# Altium PCB SAP18.PcbDoc
Units mm, origin at the board's own origin, x right, y up, seen from the top; angles counter-clockwise.
Board outline 75.31 x 34.92 mm, 4 copper layers (Top Layer, GND, PWR, Bottom Layer), stack 0.778 mm thick; 141 components, 125 nets, 471 pads, 130 vias.
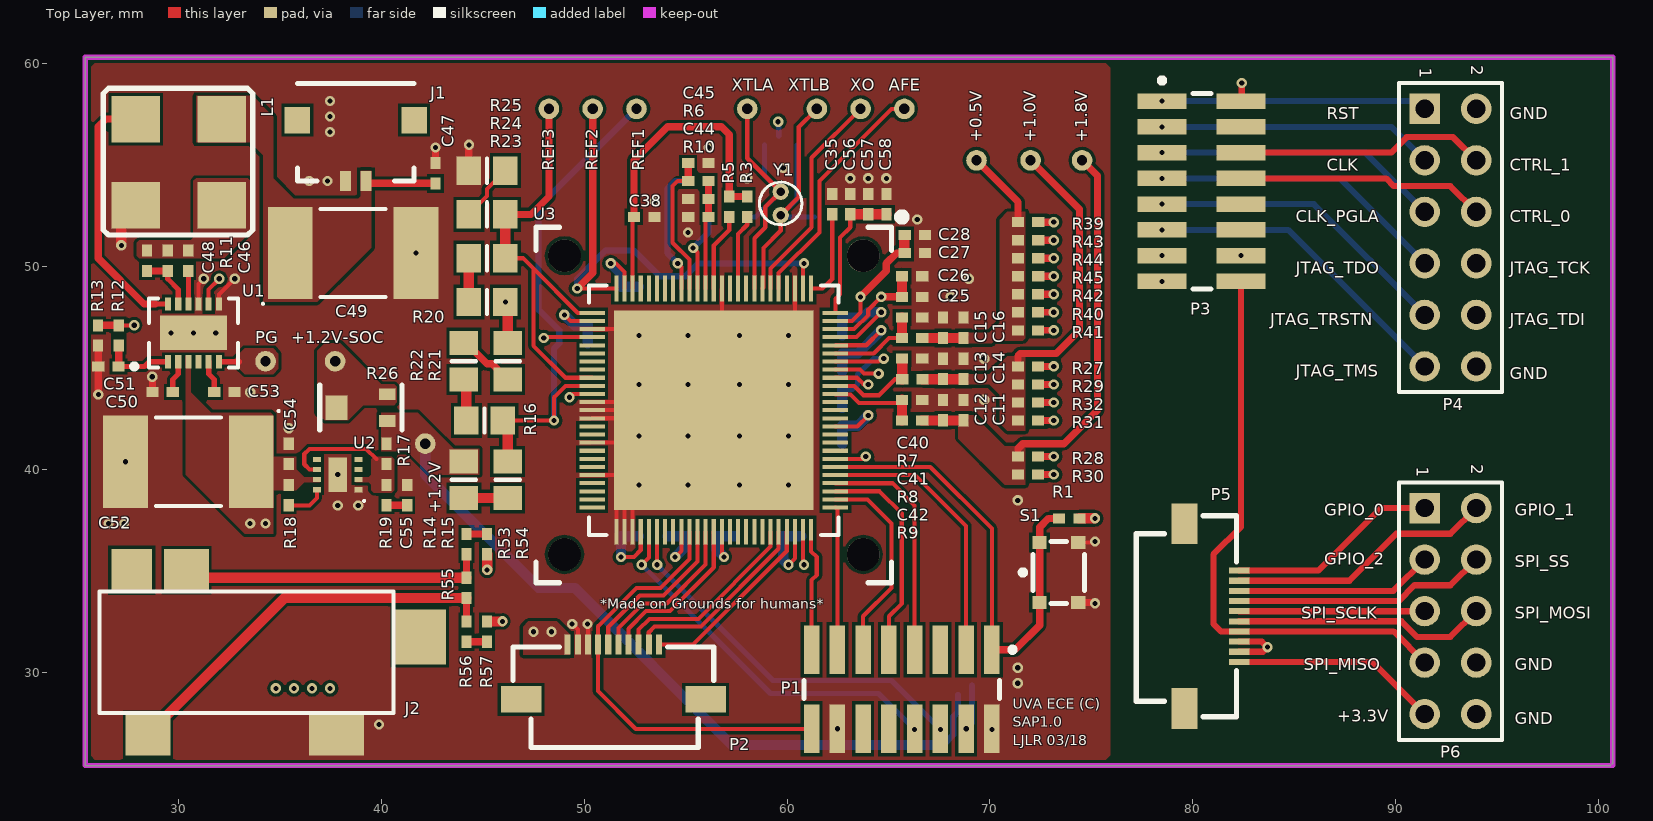
[diagram p0: Top Layer view]
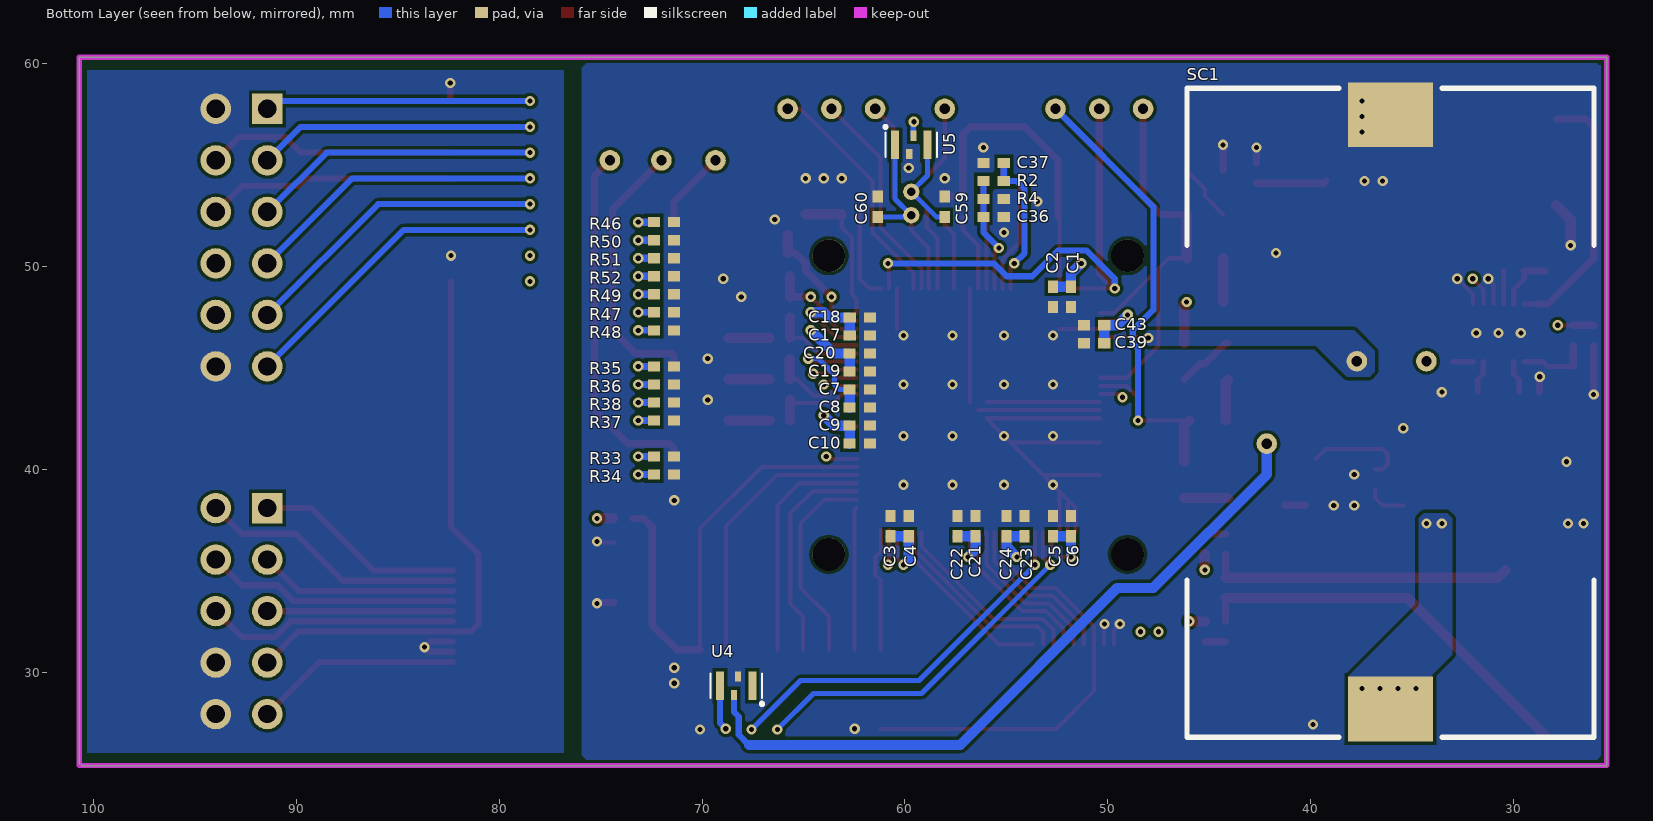
[diagram p1: Bottom Layer view, seen from below]
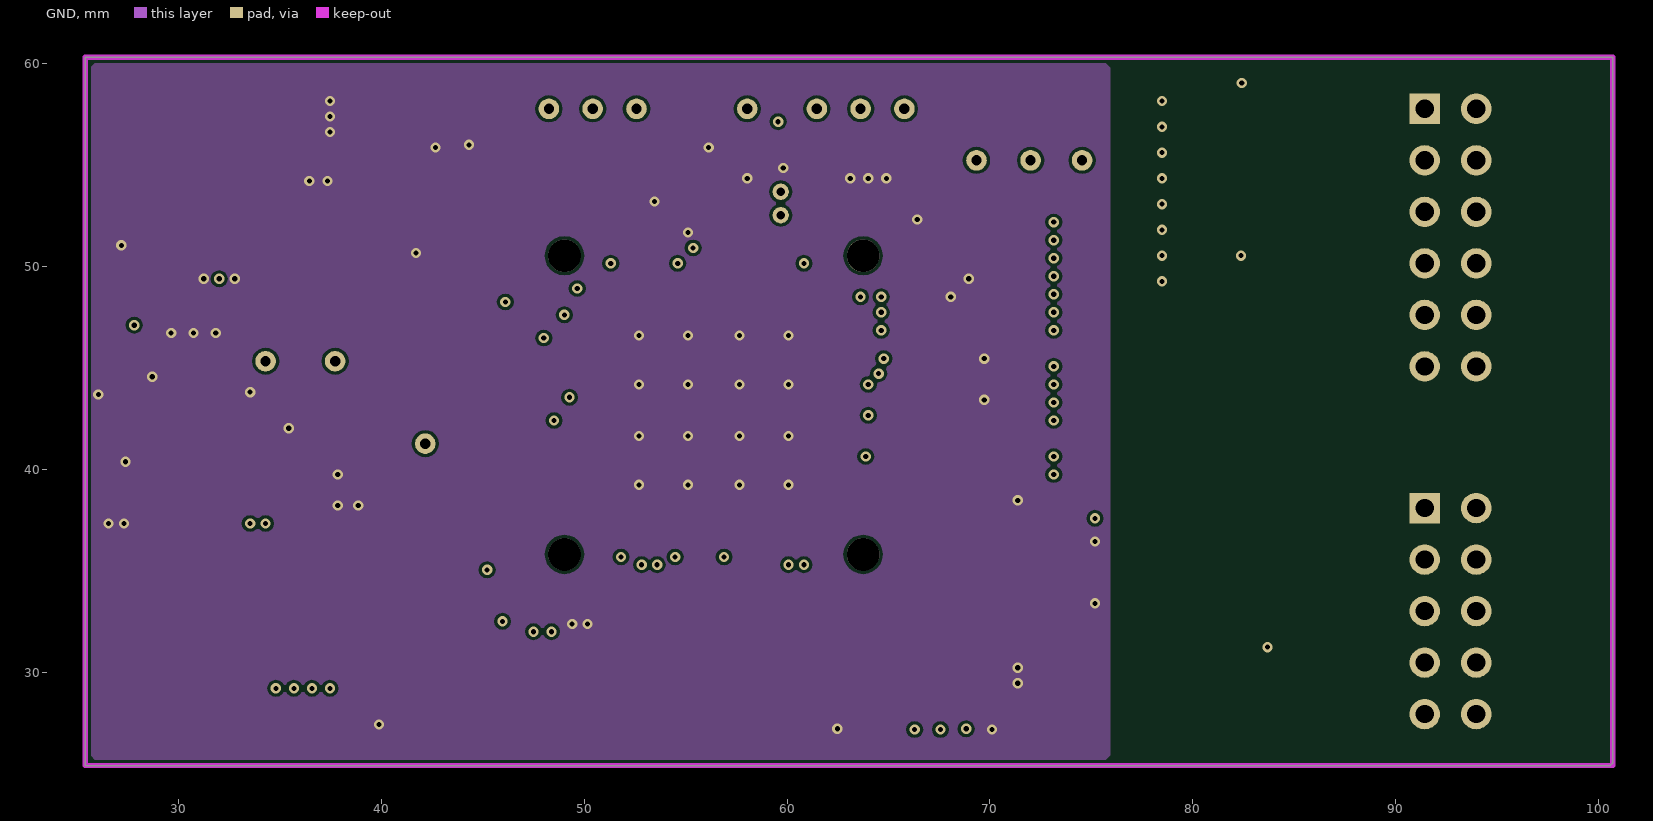
[diagram p2: GND]
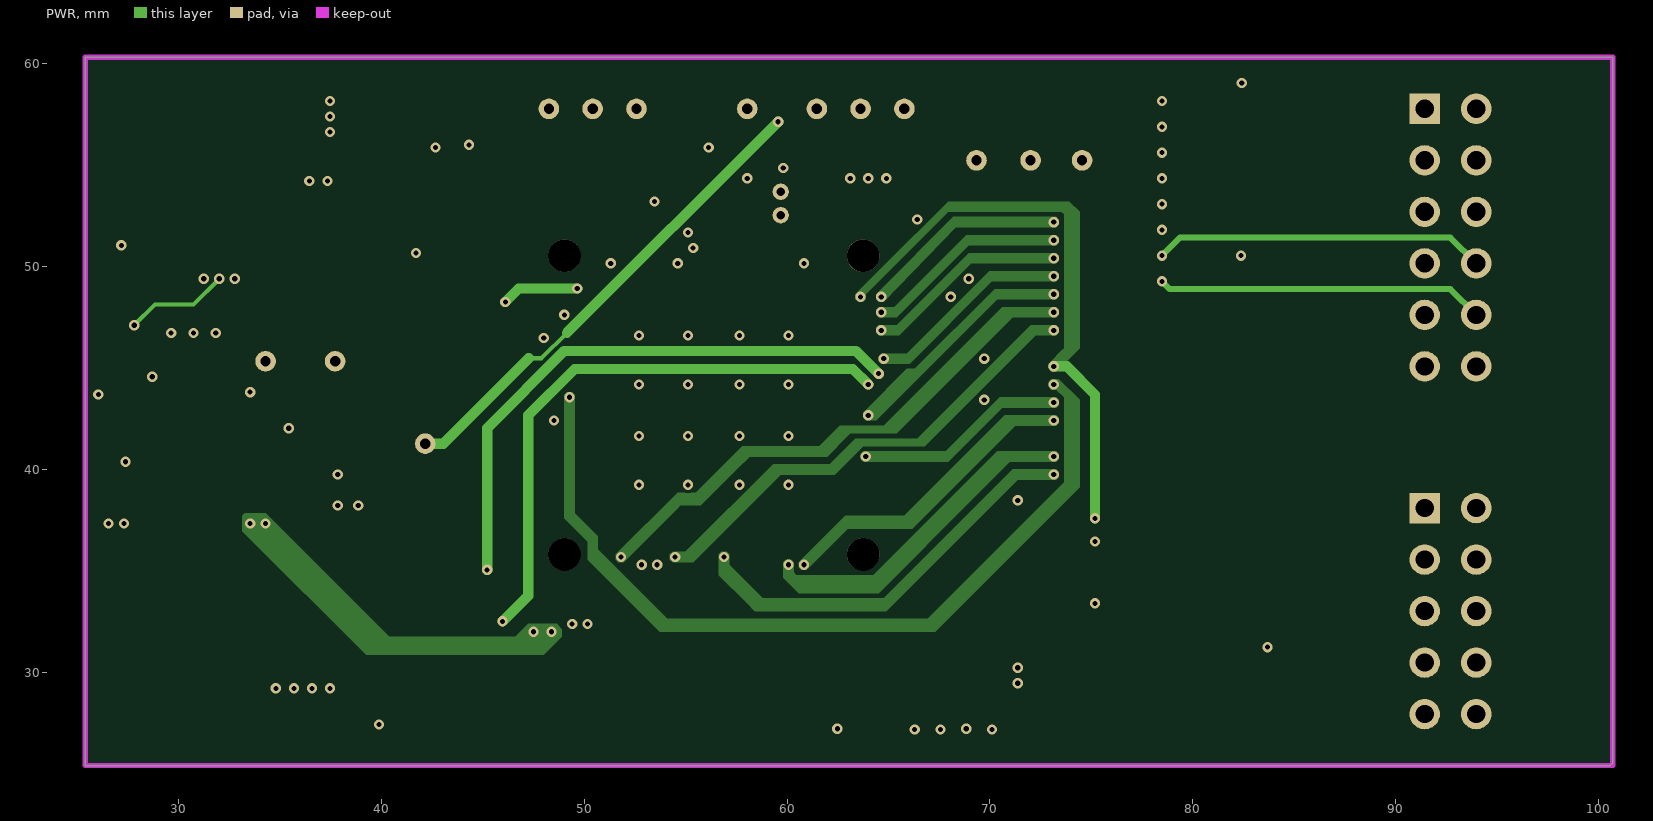
[diagram p3: PWR]

## Layer stack, top to bottom
Top Solder: solder mask 0.0102, Solder Resist, Dk 3.5
Top Layer: signal copper 0.0356
Dielectric 1: core 0.254, FR-4, Dk 4.2
GND: signal copper 0.036
Dielectric 3: prepreg 0.127, Dk 4.2
PWR: signal copper 0.036
Dielectric 2: core 0.254, Dk 4.2
Bottom Layer: signal copper 0.0356
Bottom Solder: solder mask 0.0102, Solder Resist, Dk 3.5

## Board outline
25.4,60.325 100.711,60.325 100.711,25.527 100.584,25.4 25.4,25.4

## Design rules (kind name [scope] priority, off if disabled: settings)
Clearance Clearance_InLayer [OnLayer('SL1') OR OnLayer('SL2') OR OnLayer('PWR_T') OR OnLayer('PWR_B') vs OnLayer('SL1')  OR OnLayer('SL2')  OR OnLayer('PWR_B') OR OnLayer('PWR_T')] p1: gap=0.254
Clearance [All] p2: gap=0.152
HoleToHoleClearance [All] p1: gap=0.152 allowstackedmicrovias=TRUE
MinimumAnnularRing [All] p1: minimumring=0.127
MinimumSolderMaskSliver [All] p1: minsoldermaskwidth=0.076
PlaneConnect [All] p1: planeconnectstyle=Direct reliefexpansion=0.508 reliefentries=4 reliefconductorwidth=0.254 reliefairgap=0.127
PolygonConnect [All] p1: connectstyle=Direct reliefconductorwidth=0.254 reliefentries=4 polygonreliefangle="90 Angle" airgapwidth=0.152
RoutingVias [All] p1: holewidth=0.127 width=0.381 viastyle="Through Hole" minholewidth=0.127 minwidth=0.305 maxholewidth=0.711 maxwidth=1.27
SilkToSilkClearance [All] p1: silktosilkclearance=0.076
SilkToSolderMaskClearance [IsPad] p1: minsilkscreentomaskgap=0 clearancetoexposedcopper=TRUE
SolderMaskExpansion [All] p1: expansion=0.102
Width Width_Bottom [OnLayer('Bottom Layer')] p1: maxlimit=0.508 minlimit=0.254 preferedwidth=0.305
Width Width_InLayer [OnLayer('SL1') OR OnLayer('SL2')] p2: maxlimit=0.356 minlimit=0.254 preferedwidth=0.305
Width [All] p3: maxlimit=0.508 minlimit=0.203 preferedwidth=0.356
25 further rules are at their usual default settings.

## Classes and differential pairs
component class SoC18: U3
component class PwrSel: R27 R28 R29 R30 R31 R32 R33 R34 R35 R36 R37 R38 R39 R40 R41 R42 R43 R44 R45 R46 R47 R48 R49 R50 R51 R52
component class Power: +1.2V +1.2V-SOC C46 C47 C48 C49 C50 C51 C52 C53 C54 C55 J1 L1 PG R11 R12 R13 R14 R15 R16 R17 R18 R19 R20 R21 R22 R23 R24 R25 R26 REF1 REF2 REF3 SC1 TP4 U1 U2
component class PMU: +0.5V +1.0V +1.8V C35 C36 C37 C38 C39 C40 C41 C42 C43 C44 C45 R2 R3 R4 R5 R6 R7 R8 R9 R10
component class Digital: P1 P2 R1 S1
component class Caps: C1 C2 C3 C4 C5 C6 C7 C8 C9 C10 C11 C12 C13 C14 C15 C16 C17 C18 C19 C20 C21 C22 C23 C24 C25 C26 C27 C28
component class Analog: AFE C56 C57 C58 C59 C60 J2 R53 R54 R55 R56 R57 U4 U5 XO XTLA XTLB Y1
component class Adapter: P3 P4 P5 P6

## Components (designator, comment, footprint, x,y, rotation, side; value= is the part's Value field where it differs from the comment)
+0.5V "Test point" TP 69.342,55.245 r0 top
+1.0V "Test point" TP 72.009,55.245 r0 top
+1.2V "Test point" TP 42.164,41.275 r90 top
+1.2V-SOC "Test point" TP 37.719,45.339 r90 top
+1.8V "Test point" TP 74.549,55.245 r0 top
AFE "Test point" TP 65.786,57.785 r90 top
C1 "0.1uF" 0402 51.816,48.514 r270 bottom
C2 "250pF" 0402 52.705,48.514 r270 bottom
C3 "0.1uF" 0402 60.706,37.211 r90 bottom
C4 "250pF" 0402 59.817,37.211 r90 bottom
C5 "0.1uF" 0402 52.705,37.211 r90 bottom
C6 "250pF" 0402 51.816,37.211 r90 bottom
C7 "0.1uF" 0402 62.23,43.942 r180 bottom
C8 "250pF" 0402 62.23,43.053 r180 bottom
C9 "0.1uF" 0402 62.23,42.164 r180 bottom
C10 "250pF" 0402 62.23,41.275 r180 bottom
C11 "0.1uF" 0402 68.707,42.926 r90 top
C12 "250pF" 0402 67.691,42.926 r90 top
C13 "0.1uF" 0402 67.691,44.958 r90 top
C14 "250pF" 0402 68.707,44.958 r90 top
C15 "0.1uF" 0402 67.691,46.99 r90 top
C16 "250pF" 0402 68.707,46.99 r90 top
C17 "0.1uF" 0402 62.222,46.609 r180 bottom
C18 "250pF" 0402 62.222,47.498 r180 bottom
C19 "0.1uF" 0402 62.23,44.831 r180 bottom
C20 "250pF" 0402 62.23,45.72 r180 bottom
C21 "0.1uF" 0402 56.515,37.211 r90 bottom
C22 "250pF" 0402 57.404,37.211 r90 bottom
C23 "0.1uF" 0402 54.102,37.211 r90 bottom
C24 "250pF" 0402 54.991,37.211 r90 bottom
C25 "0.1uF" 0402 66.167,48.514 r0 top
C26 "250pF" 0402 66.167,49.53 r0 top
C27 "0.1uF" 0402 66.302,50.673 r0 top
C28 "250pF" 0402 66.302,51.562 r0 top
C35 "Cap Pol3" 0402 62.23,53.086 r90 top
C36 "Cap Pol3" 0402 55.626,52.451 r180 bottom
C37 "Cap Pol3" 0402 55.626,55.118 r0 bottom
C38 "Cap Pol3" 0402 52.959,52.451 r0 top
C39 "Cap Pol3" 0402 50.673,46.228 r0 bottom
C40 "Cap Pol3" 0402 66.167,47.498 r0 top
C41 "Cap Pol3" 0402 66.167,45.466 r0 top
C42 "Cap Pol3" 0402 66.167,43.434 r0 top
C43 "Cap Pol3" 0402 50.673,47.117 r0 bottom
C44 "Cap Pol3" 0402 55.626,53.34 r180 top
C45 "Cap Pol3" 0402 55.626,55.118 r0 top
C46 "Cap Semi" 0402 30.48,50.292 r270 top
C47 "Cap Semi" 0402 42.672,54.61 r90 top
C48 "Cap Semi" 0402 28.448,50.292 r270 top
C49 "330uF" CAPCP7343X43NEW 38.608,50.673 r0 top
C50 "Cap Semi" 0402 29.21,43.815 r0 top
C51 "Cap Semi" 0402 26.543,45.085 r0 top
C52 "220uF" CAPCP7343X43NEW 30.48,40.386 r180 top
C53 "Cap Semi" 0402 32.258,43.815 r180 top
C54 "Cap Semi" 0402 35.433,40.767 r270 top
C55 "Cap Semi" 0402 41.275,38.735 r270 top
C56 "3.3uF" 0402 63.119,53.086 r90 top
C57 "3.3uF" 0402 64.008,53.086 r90 top
C58 "3.3uF" 0402 64.897,53.086 r90 top
C59 "Cap Pol3" 0402 58.039,52.959 r90 bottom
C60 "Cap Pol3" 0402 61.341,52.959 r90 bottom
J1 "MolexPicoLock" 5037630291_MolexPicoLock 38.735,54.229 r0 top
J2 "Audio Jack" "Audio Jack" 29.591,30.988 r0 top
L1 "LPR6235-752" LPR6235-752 32.131,57.277 r270 top
P1 "HDR2X8_127" HDR2X8_127 70.104,31.115 r180 top
P2 "Header 10" 505110-1092 51.435,31.369 r0 top
P3 "HDR2X8_127" HDR2X8_127 78.486,58.166 r270 top
P4 "Header 6X2" HDR2X6 91.44,57.785 r270 top
P5 "Header 10" 505110-1092 82.296,32.766 r270 top
P6 "Header 5X2" HDR2X5 91.44,38.1 r270 top
PG "Test point" TP 34.29,45.339 r90 top
R1 "Res3" 0402 73.914,37.592 r180 top
R2 "Res3" 0402 55.626,54.229 r180 bottom
R3 "Res3" 0402 58.039,52.959 r270 top
R4 "Res3" 0402 55.626,53.34 r0 bottom
R5 "Res3" 0402 57.15,52.959 r90 top
R6 "Res3" 0402 55.626,54.229 r180 top
R7 "Res3" 0402 66.167,46.482 r0 top
R8 "Res3" 0402 66.183,44.45 r0 top
R9 "Res3" 0402 66.167,42.418 r0 top
R10 "Res3" 0402 55.626,52.451 r0 top
R11 "Res3" 0402 29.464,50.292 r270 top
R12 "Res3" 0402 27.051,46.609 r90 top
R13 "Res3" 0402 26.035,46.609 r90 top
R14 "Res3" 6-0805_N 44.069,39.497 r270 top
R15 "Res3" 6-0805_N 46.228,39.497 r90 top
R16 "Res3" 6-0805_N 45.085,42.418 r180 top
R17 "Res3" 0402 40.259,40.767 r90 top
R18 "Res3" 0402 35.433,38.735 r270 top
R19 "Res3" 0402 40.259,38.735 r90 top
R20 "Res3" 6-0805_N 45.212,48.26 r0 top
R21 "Res3" 6-0805_N 46.228,45.339 r270 top
R22 "Res3" 6-0805_N 44.069,45.339 r270 top
R23 "Res3" 6-0805_N 45.212,50.419 r0 top
R24 "Res3" 6-0805_N 45.212,52.578 r180 top
R25 "Res3" 6-0805_N 45.212,54.737 r180 top
R26 "Pot100K" Pot100K 38.989,43.053 r90 top
R27 "Res3" 0402 71.882,45.085 r180 top
R28 "Res3" 0402 71.882,40.64 r180 top
R29 "Res3" 0402 71.882,44.196 r180 top
R30 "Res3" 0402 71.882,39.751 r180 top
R31 "Res3" 0402 71.882,42.418 r180 top
R32 "Res3" 0402 71.882,43.307 r180 top
R33 "Res3" 0402 71.882,40.64 r180 bottom
R34 "Res3" 0402 71.882,39.751 r180 bottom
R35 "Res3" 0402 71.882,45.085 r180 bottom
R36 "Res3" 0402 71.882,44.196 r180 bottom
R37 "Res3" 0402 71.882,42.418 r180 bottom
R38 "Res3" 0402 71.882,43.307 r180 bottom
R39 "Res3" 0402 71.89,52.197 r180 top
R40 "Res3" 0402 71.882,47.752 r180 top
R41 "Res3" 0402 71.882,46.863 r180 top
R42 "Res3" 0402 71.882,48.641 r180 top
R43 "Res3" 0402 71.89,51.308 r180 top
R44 "Res3" 0402 71.89,50.419 r180 top
R45 "Res3" 0402 71.89,49.53 r180 top
R46 "Res3" 0402 71.882,52.197 r180 bottom
R47 "Res3" 0402 71.882,47.752 r180 bottom
R48 "Res3" 0402 71.882,46.863 r180 bottom
R49 "Res3" 0402 71.882,48.641 r180 bottom
R50 "Res3" 0402 71.882,51.308 r180 bottom
R51 "Res3" 0402 71.882,50.419 r180 bottom
R52 "Res3" 0402 71.882,49.53 r180 bottom
R53 "Res3" 0402 44.196,36.322 r90 top
R54 "Res3" 0402 45.212,36.322 r270 top
R55 "Res3" 0402 44.196,34.163 r270 top
R56 "Res3" 0402 44.196,32.004 r270 top
R57 "Res3" 0402 45.212,32.004 r90 top
REF1 "Test point" TP 52.578,57.785 r90 top
REF2 "Test point" TP 50.419,57.785 r90 top
REF3 "Test point" TP 48.26,57.785 r90 top
S1 "Pushbutton" KMT031 73.406,34.925 r90 top
SC1 "SC" SocketBattCR2032 36.068,28.194 r90 bottom
U1 "LTC3108" QFN0P300X400X80_HS-13M 30.734,46.736 r0 top
U2 "MCP1810" MCP1810 37.846,39.751 r180 top
U3 "SoC18" "MLF_7009 - NoHoles" 56.388,42.926 r270 top
U4 "SiT1533" SiT1533 68.326,29.337 r0 bottom
U5 "SiT1533" SiT1533 59.69,56.007 r180 bottom
XO "Test point" TP 63.627,57.785 r90 top
XTLA "Test point" TP 58.039,57.785 r90 top
XTLB "Test point" TP 61.468,57.785 r90 top
Y1 "Xtal" Xtal_C2 59.69,53.467 r270 top

## Footprints (in the part's own frame and the unit in brackets; to place one, negate y for a bottom-side part, rotate by r counter-clockwise, add the part's x,y. Pads: shape width x height; smd on the part's side, far side on the other; paste and mask are expansions set on the pad)
6-0805_N [mm] "Chip Resistor, Body 2.0x1.2mm, IPC Medium Density"
  rect 1.2x1.4 smd: 1(-0.9,0) 2(0.9,0)
  silkscreen extent 0,-0.6 0,0.6, body extent -1.07,-0.7 1.07,0.7, height 0.7
0402 [mm] "Chip Capacitor, Body 1.0x0.5mm, IPC High Density"
  rect 0.6x0.5 smd: 1(-0.5,0) 2(0.5,0)
  body extent -0.55,-0.3 0.55,0.3, height 1.3
505110-1092 [mm] "FFC Connector 10 pins 0.5mm"
  rect 0.3x1 smd: 1(-2.25,0) 2(-1.75,0) 3(-1.25,0) 4(-0.75,0) 5(-0.25,0) 6(0.25,0) 7(0.75,0) 8(1.25,0) 9(1.75,0) 10(2.25,0)
  rect 2x1.3 smd: ""(-4.55,-2.7) ""(4.55,-2.7)
  silkscreen extent -4.95,-5.08 4.95,-0.13, body extent -5.25,-5.27 5.25,0.03, height 1.88
5037630291_MolexPicoLock [mm] "Molex Pico-Lock 2 pin 1.0mm"
  rect 0.55x1 smd: 1(-0.5,0) 2(0.5,0)
  rect 1.26x1.3 smd: ""(-2.875,3) ""(2.875,3)
  silkscreen extent -2.88,0 2.88,4.8, body extent -3.3,-0.31 3.3,4.88, height 1.48
"Audio Jack" [mm] "Audio Jack"
  rect 2.2x2.1 smd: 1(-1.1,-4.05) 2(0.8,4.05)
  rect 2.7x2.1 smd: 3(8.2,-4.05)
  rect 2x2.1 smd: 4(-1.9,4.05)
  rect 2.6x2.7 smd: 5(12.3,0.75)
  silkscreen extent -3.5,-3 11,3, body extent -6.07,-4.55 12.93,4.45, height 6
CAPCP7343X43NEW [mm] "Chip Capacitor, 2-Leads, Body 7.30x4.30mm, IPC Medium Density"
  rect 2.2x4.55 smd: 1(-3.1,0) 2(3.1,0)
  silkscreen extent -4.5,-2.55 1.6,2.17, body extent -3.75,-2.25 3.75,2.25, height 4.3
HDR2X5 [mm] "Connector; Header; 5x2 Position"
  rect 1.5x1.5 hole 0.9: 1(0,0)
  round 1.5 hole 0.9: 2(0,2.54) 3(2.54,0) 4(2.54,2.54) 5(5.08,0) 6(5.08,2.54) 7(7.62,0) 8(7.62,2.54) 9(10.16,0) 10(10.16,2.54)
  silkscreen extent -1.27,-1.27 11.43,3.81
HDR2X6 [mm] "Connector; Header; 6x2 Position"
  rect 1.5x1.5 hole 0.9: 1(0,0)
  round 1.5 hole 0.9: 2(0,2.54) 3(2.54,0) 4(2.54,2.54) 5(5.08,0) 6(5.08,2.54) 7(7.62,0) 8(7.62,2.54) 9(10.16,0) 10(10.16,2.54) 11(12.7,0) 12(12.7,2.54)
  silkscreen extent -1.27,-1.27 13.97,3.81
HDR2X8_127 [mm] "Header 16 positions 1.27mm"
  rect 0.76x2.4 smd: 1(0,0) 2(0,3.9) 3(1.27,0) 4(1.27,3.9) 5(2.54,0) 6(2.54,3.9) 7(3.81,0) 8(3.81,3.9) 9(5.08,0) 10(5.08,3.9) 11(6.35,0) 12(6.35,3.9) 13(7.62,0) 14(7.62,3.9) 15(8.89,0) 16(8.89,3.9)
  silkscreen extent -1.14,-0.13 9.27,2.41, body extent -0.63,-0.85 9.53,4.66, height 6.4
KMT031 [mm] "Ultra-low Profile Tact Switch"
  rect 0.65x0.7 smd: 1(-1.475,0.95) 2(1.475,0.95) 3(-1.475,-0.95) 4(1.475,-0.95)
  silkscreen extent -1.52,-1.27 1.52,1.9
LPR6235-752 [mm] "Inductor LPR6235-752"
  round 1 on Top Overlay: 0(-2.032,1.905)
  rect 2.3x2.4 smd: 1(0,0) 2(0,-4.25) 3(4.25,-4.25) 4(4.25,0)
  silkscreen extent -1.52,-5.84 5.72,1.52, body extent -0.92,-5.29 5.16,0.79, height 3.55
MCP1810 [mm] "QFN, 8-Leads, Body 2.00x2.00mm, Pitch 0.50mm, Thermal Pad 0.90x1.70mm, IPC Low Density"
  rect 0.4x0.25 smd: 1(-1.025,0.75) 2(-1.025,0.25) 3(-1.025,-0.25) 4(-1.025,-0.75) 5(1.025,-0.75) 6(1.025,-0.25) 7(1.025,0.25) 8(1.025,0.75)
  rect 0.9x1.7 smd: 9(0,0)
  silkscreen extent -1.35,1.25 -1.25,1.35, body extent -1,-1 1,1, height 0.9
"MLF_7009 - NoHoles" [mm] "QFN, 100-Leads, Body 12.00x12.00mm, Pitch 0.40mm, Thermal Pad 10.10x10.10mm, IPC Low Density"
  rect 1.26x0.2 smd: 1(-6,4.8) 2(-6,4.4) 3(-6,4) 4(-6,3.6) 5(-6,3.2) 6(-6,2.8) 7(-6,2.4) 8(-6,2) 9(-6,1.6) 10(-6,1.2) 11(-6,0.8) 12(-6,0.4) 13(-6,0) 14(-6,-0.4) 15(-6,-0.8) 16(-6,-1.2) 17(-6,-1.6) 18(-6,-2) 19(-6,-2.4) 20(-6,-2.8) 21(-6,-3.2) 22(-6,-3.6) 23(-6,-4) 24(-6,-4.4) 25(-6,-4.8) 51(6,-4.8) 52(6,-4.4) 53(6,-4) 54(6,-3.6) 55(6,-3.2) 56(6,-2.8) 57(6,-2.4) 58(6,-2) 59(6,-1.6) 60(6,-1.2) 61(6,-0.8) 62(6,-0.4) 63(6,0) 64(6,0.4) 65(6,0.8) 66(6,1.2) 67(6,1.6) 68(6,2) 69(6,2.4) 70(6,2.8) 71(6,3.2) 72(6,3.6) 73(6,4)
  rect 0.2x1.26 smd: 26(-4.8,-6) 27(-4.4,-6) 28(-4,-6) 29(-3.6,-6) 30(-3.2,-6) 31(-2.8,-6) 32(-2.4,-6) 33(-2,-6) 34(-1.6,-6) 35(-1.2,-6) 36(-0.8,-6) 37(-0.4,-6) 38(0,-6) 39(0.4,-6) 40(0.8,-6) 41(1.2,-6) 42(1.6,-6) 43(2,-6) 44(2.4,-6) 45(2.8,-6) 46(3.2,-6) 47(3.6,-6) 48(4,-6) 49(4.4,-6) 50(4.8,-6) 76(4.8,6) 77(4.4,6) 78(4,6) 79(3.6,6) 80(3.2,6) 81(2.8,6) 82(2.4,6) 83(2,6) 84(1.6,6) 85(1.2,6) 86(0.8,6) 87(0.4,6) 88(0,6) 89(-0.4,6) 90(-0.8,6) 91(-1.2,6) 92(-1.6,6) 93(-2,6) 94(-2.4,6) 95(-2.8,6) 96(-3.2,6) 97(-3.6,6) 98(-4,6) 99(-4.4,6) 100(-4.8,6)
  rect 1.06x0.2 smd: 74(5.9,4.4) 75(5.9,4.8)
  rect 9.85x9.85 smd: 101(0,0)
  round 1.61 hole 1.61 unplated: ""(-7.612,-7.362) ""(-7.612,7.362) ""(7.113,-7.362) ""(7.113,7.362)
  silkscreen extent -9.65,-8.76 8.51,9.4, body extent -6,-6 6,6, height 1
Pot100K [mm] "EVM-2WSX80B15 100K Trimpot SMD"
  rect 0.575x0.8 smd: 1(-0.663,-1.3) 3(0.663,-1.3)
  rect 1.2x1.1 smd: 2(0,1.2)
  silkscreen extent -1.1,-2.03 1.1,2.03
QFN0P300X400X80_HS-13M [mm] "QFN, 12-Leads, Body 3.00x4.00mm, Pitch 0.00mm/0.50mm, Thermal Pad 1.70x3.30mm, IPC Low Density"
  rect 0.3x0.65 smd: 1(-1.25,-1.425) 2(-0.75,-1.425) 3(-0.25,-1.425) 4(0.25,-1.425) 5(0.75,-1.425) 6(1.25,-1.425) 7(1.25,1.425) 8(0.75,1.425) 9(0.25,1.425) 10(-0.25,1.425) 11(-0.75,1.425) 12(-1.25,1.425)
  rect 3.3x1.7 smd: 13(0,0)
  silkscreen extent -3.04,-1.78 2.2,1.7, body extent -2.05,-1.55 2.05,1.55, height 0.8
SiT1533 [mm] "Ultra-low Power 32 KHz Clock"
  rect 0.4x1.4 smd: 1(-0.8,0) 3(0.8,0)
  rect 0.3x0.5 smd: 2(-0.1,-0.45) 4(0.1,0.45)
  silkscreen extent -1.3,-0.6 1.27,0.91
SocketBattCR2032 [mm] "Socket Battery CR2032"
  rect 3.2x4.2 smd: 1(0,0) 2(29.3,0)
  silkscreen extent -1.4,-10.03 30.61,10.03, body extent -1.39,-10 30.61,10, height 5.3
TP [mil] "Test point"
  round 40 hole 20: 1(0,0)
Xtal_C2 [mm]
  round 0.8 hole 0.4: 1(-0.229,0) 2(0.928,0)
  silkscreen extent -0.7,-1.05 1.4,1.05, body extent -0.61,-1 1.38,1, height 6

## Part data
C1 C2 C3 C4 C5 C6 C7 C8 C9 C10 C11 C12 C13 C14 C15 C16 C17 C18 C19 C20 C21 C22 C23 C24 C25 C26 C27 C28 C56 C57 C58: library part C
C35 C36 C37 C38 C39 C40 C41 C42 C43 C44 C45 C59 C60: "Polarized Capacitor (Surface Mount)"
C46 C47 C48 C50 C51 C53 C54 C55: "Capacitor (Semiconductor SIM Model)"
C49 C52: library part BoostCap
J1: "Molex Pico Lock 2 pin"
P1 P3: "Header 16 positions 1.27mm"
P2 P5: "Header, 10-Pin"
P4: "Header, 6-Pin, Dual row"
P6: "Header, 5-Pin, Dual row"
R1 R2 R3 R4 R5 R6 R7 R8 R9 R10 R11 R12 R13 R14 R15 R16 R17 R18 R19 R20 R21 R22 R23 R24 R25 R27 R28 R29 R30 R31 R32 R33 R34 R35 R36 R37 R38 R39 R40 R41 R42 R43 R44 R45 R46 R47 R48 R49 R50 R51 R52 R53 R54 R55 R56 R57: "Resistor"
R26: "EVM-2WSX80B15 100K Trimpot SMD"
S1: library part PB_SW, "Pushbutton, 4 leads"
SC1: library part "Soket Battery CR2032", "Socket Battery CR2032"
U2: "Ultra-low Power LDO"
U3: "UVA SoC ASSIST 2018"
U4 U5: "Ultra-low Power 32KHz Oscillator"

## Via types
v1: diameter 0.508, hole 0.254, Top Layer to Bottom Layer, tented both sides, 111 vias
v2: diameter 0.508, hole 0.254, Top Layer to Bottom Layer, 19 vias

## Nets (pads, with @x,y where several pads share a name; then routed paths per layer and width w, separated by ;. In a path a pad name is that pad's centre, name@x,y a point inside that pad or via, vN(x,y) a via of type N, cw(c..) or ccw(c..) an arc to the next point about the centre after c; other vN are vias at no path point)
+1.2V: +1.2V.1 R14.1 R17.2 R26.1 U4.4 U5.4 | length 60
  PWR w0.203: 47.266,45.488 47.901,45.488 49.149,46.736
  PWR w0.508: +1.2V.1 43.053,41.275 47.266,45.488 ; 49.149,46.736 v1(59.563,57.15)
  Bottom Layer w0.254: U5.4 v1@59.59,57.123
  Bottom Layer w0.305: 67.691,26.416 68.199,26.924 68.199,27.813 68.426,28.04 U4.4
  Bottom Layer w0.508: +1.2V.1 42.164,39.751 47.752,34.163 49.53,34.163 57.277,26.416 67.691,26.416
+3.3V: C52.1 C54.2 P2.1 R18.1 SC1.1 U1.3 U2.7
  other v1: 34.798,29.21 35.687,29.21 36.576,29.21 37.465,29.21 47.498,32.004 48.387,32.004 33.528,37.338 34.29,37.338
+3.3V_A: P5.10 P6.9 | length 10.2
  Top Layer w0.305: P5.10 88.864,30.516 P6.9
+VIN-BST-T: C47.1 C49.1 J1.2 L1.1 | length 3.5
  Top Layer w0.356: J1.2 39.354,54.11 C47.1
AFE_BUF_PG: R32.1 R38.1 U3.82 | length 3.1
  Top Layer w0.203: U3.82 63.767,40.526 v1(63.881,40.64)
  Top Layer w0.356: R32.1 v1(73.152,43.307)
  Bottom Layer w0.356: R38.1 v1(73.152,43.307)
AFE_OUT: AFE.1 U3.5 | length 11.8
  Top Layer w0.203: U3.5 59.588,49.682 61.595,51.689 61.595,54.229 65.151,57.785 AFE.1
AFE_VBIAS_P: C56.1 C57.1 C58.1 U3.100 | length 6.9
  Top Layer w0.203: U3.100 62.388,48.418 62.611,48.641 62.611,51.435 63.119,51.943 C56.1
  Top Layer w0.508: C56.1 C57.1 C58.1
BLE_MOSI: U3.41
BLE_PWR_GATE: U3.47
BLE_SCLK: U3.40
BLE_SPI_RST: U3.45
BLE_TX_RST: U3.44
CLK: P1.3 U3.80 | length 13.6
  Top Layer w0.203: U3.80 66.319,39.726 68.834,37.211 P1.3
CLK_A: P3.3 P4.3 | length 13.6
  Bottom Layer w0.305: v1(78.486,56.896) 89.789,56.896 P4.3
CLK_PGLA: P1.5
CLK_PGLA_A: P3.5 P4.5 | length 14.2
  Bottom Layer w0.305: v1(78.486,55.626) 88.519,55.626 P4.5
CLKO: P1.4 U4.3 | length 2.2
  Bottom Layer w0.305: v1(68.834,27.215) 69.126,27.507 U4.3
CNTRL0: P1.8 U3.55 | length 18.6
  Top Layer w0.203: v1(52.832,35.306) 53.188,35.662 U3.55
  Bottom Layer w0.254: v1(52.832,35.306) 59.182,28.956 64.516,28.956 v1(66.294,27.178)
CNTRL0_A: P3.8 P4.6 | length 12.3
  Top Layer w0.305: P3.8 89.535,54.356 89.916,53.975 92.71,53.975 P4.6
CNTRL1: P1.6 U3.56 | length 19
  Top Layer w0.203: U3.56 53.588,35.312 v1(53.594,35.306)
  Bottom Layer w0.254: v1(53.594,35.306) 59.309,29.591 65.151,29.591 v1(67.564,27.178)
CNTRL1_A: P3.6 P4.4 | length 12.4
  Top Layer w0.305: P3.6 89.789,55.626 90.551,56.388 92.837,56.388 P4.4
FRAM_DIS: R29.1 R36.1 U3.36 | length 2.7
  Top Layer w0.203: v1(49.276,43.561) 49.441,43.726 U3.36
  Top Layer w0.356: R29.1 v1(73.152,44.196)
  Bottom Layer w0.356: R36.1 v1(73.152,44.196)
GND: C1.2 C2.2 C3.2 C4.2 C5.2 C6.2 C7.2 C8.2 C9.2 C10.2 C11.2 C12.2 C13.2 C14.2 C15.2 C16.2 C17.2 C18.2 C19.2 C20.2 C21.2 C22.2 C23.2 C24.2 C25.2 C26.2 C27.2 C28.2 C35.2 C36.2 C37.2 C38.2 C39.2 C40.2 C41.2 C42.2 C43.2 C44.2 C45.2 C47.2 C49.2 C50.1 C51.1 C52.2 C53.1 C54.1 C55.1 C56.2 C57.2 C58.2 C59.2 C60.2 J1.1 J2.3 L1.3 P1.2 P1.14 P2.2 P2.3 R4.1 R10.1 R13.1 R25.2 R33.2 R34.2 R35.2 R36.2 R37.2 R38.2 R46.2 R47.2 R48.2 R49.2 R50.2 R51.2 R52.2 S1.3 S1.4 SC1.2 U1.7 U1.9 U1.13 U2.1 U2.9 U3.3 U3.12 U3.28 U3.37 U3.38 U3.39 U3.42 U3.46 U3.51 U3.52 U3.53 U3.101 U4.2 U5.2 | length 59.2
  Top Layer w0.203: U1.9 30.984,49.145 v1(31.242,49.403) ; U1.7 31.984,48.621 v1(32.766,49.403) ; v1(49.403,32.385) 49.685,32.103 P2.2 ; v1(50.165,32.385) 50.185,32.365 P2.3 ; U3.46 U3.101@53.188,39.726 ; U3.42 U3.101@54.788,41.326 ; U3.39 55.988,42.526 v2(55.118,41.656) U3.101@54.788,41.326 ; U3.38 U3.101 ; U3.37 U3.101@55.988,43.326 ; U3.28 U3.101@52.388,46.926 ; U3.51 51.588,38.126 U3.101@51.88,38.417 ; U3.52 51.988,38.309 U3.101@51.88,38.417 ; U3.53 U3.101@52.388,38.926 ; U3.101@56.788,43.326 U3.12 ; U3.101@60.388,46.926 U3.3 ; S1.4 75.135,36.4 v1(75.184,36.449) ; U3.101@51.88,38.417 U3.101@52.388,38.926 ; U3.101@52.388,38.926 v2(52.705,39.243) U3.101@53.188,39.726 ; U3.101@53.188,39.726 U3.101@54.788,41.326
  Top Layer w0.356: R13.1 26.035,45.093 C51.1 v1(26.043,43.696) ; C50.1 v1@28.71,44.569 ; C47.2 v1(42.672,55.88) ; R25.2 44.312,55.996 v1(44.323,56.007) ; S1.3 75.135,33.45 v1(75.184,33.401)
  Top Layer w0.508: v1(27.178,51.054) 27.178,52.324 L1.3
  other v1: 70.104,27.178 62.484,27.215 39.878,27.432 71.374,29.464 71.374,30.226 26.543,37.338 27.305,37.338 37.846,38.227 38.862,38.227 71.374,38.481 37.846,39.751 27.38,40.386 35.433,42.037 69.723,43.434 33.528,43.815 28.702,44.577 69.723,45.466 68.072,48.514 68.961,49.403 41.708,50.673 55.118,51.689 66.421,52.324 53.467,53.213 36.449,54.229 37.338,54.229 58.039,54.356 63.119,54.356 64.008,54.356 64.897,54.356 59.817,54.864 56.134,55.88 37.465,56.642 37.465,57.404 37.465,58.166
  other v2: 55.118,39.243 57.658,39.243 60.071,39.243 52.705,41.656 57.658,41.656 60.071,41.656 52.705,44.196 55.118,44.196 57.658,44.196 60.071,44.196 52.705,46.609 55.118,46.609 57.658,46.609 60.071,46.609 29.634,46.736 30.734,46.736 31.834,46.736
GND_A: P3.2 P3.14 P4.2 P4.12 P5.8 P5.9 P6.8 P6.10 | length 3.9
  Top Layer w0.305: P5.9 83.467,31.016 v1(83.693,31.242) 83.419,31.516 P5.8 ; P3.2@82.423,58.203 v1(82.423,59.055)
  other v1: 82.386,50.546
GPIO_0: P2.10 U3.72 | length 9.2
  Top Layer w0.203: P2.10 55.372,31.369 59.988,35.985 U3.72
GPIO_0_A: P5.1 P6.1 | length 10.4
  Top Layer w0.305: P5.1 86.197,35.016 89.281,38.1 P6.1
GPIO_1: P2.9 U3.71 | length 9.5
  Top Layer w0.203: P2.9 53.185,31.976 53.467,32.258 55.753,32.258 59.588,36.093 U3.71
GPIO_1_A: P5.2 P6.2 | length 13.2
  Top Layer w0.305: P5.2 87.729,34.516 90.043,36.83 92.71,36.83 P6.2
GPIO_2: P2.8 U3.70 | length 9.7
  Top Layer w0.203: P2.8 52.685,32.111 53.213,32.639 55.626,32.639 59.188,36.201 U3.70
GPIO_2_A: P5.3 P6.3 | length 9.8
  Top Layer w0.305: P5.3 89.896,34.016 P6.3
GPIO_3: U3.69
GPIO_4: U3.68
GPIO_5: U3.67
GPIO_6: U3.66
GPIO_7: U3.65
INT_REF_1P0: C36.1 R2.1 R4.2 U3.15 | length 5.7
  Top Layer w0.203: v1(55.372,50.927) 55.588,50.711 U3.15
  Bottom Layer w0.305: v1(55.372,50.927) 56.126,51.681 C36.1 R2.1
INT_REF_1P8: C44.1 R6.1 R10.2 U3.14 | length 5.4
  Top Layer w0.203: U3.14 55.988,52.313 R10.2
  Top Layer w0.356: R10.2 C44.1 R6.1
JTAG_TCK: P1.13 U3.76 | length 7.1
  Top Layer w0.203: U3.76 62.484,38.03 P1.13
JTAG_TCK_A: P3.13 P4.8 | length 16.4
  PWR w0.305: v1(78.486,50.546) 79.375,51.435 92.71,51.435 P4.8
JTAG_TDI: P1.15 U3.75 | length 6.1
  Top Layer w0.203: U3.75 61.188,35.967 61.468,35.687 61.468,34.798 61.214,34.544 P1.15
JTAG_TDI_A: P3.15 P4.10 | length 16.2
  PWR w0.305: v1(78.486,49.276) 78.867,48.895 92.71,48.895 P4.10
JTAG_TDO: P1.7 U3.79 | length 11.5
  Top Layer w0.203: U3.79 65.195,39.326 66.294,38.227 P1.7
JTAG_TDO_A: P3.7 P4.7 | length 14.7
  Bottom Layer w0.305: v1(78.486,54.356) 87.249,54.356 P4.7
JTAG_TMS: P1.11 U3.77 | length 10.1
  Top Layer w0.203: U3.77 63.963,38.526 65.151,37.338 65.151,34.163 63.754,32.766 P1.11
JTAG_TMS_A: P3.11 P4.11 | length 15.7
  Bottom Layer w0.305: v1(78.486,51.816) 84.709,51.816 P4.11
JTAG_TRSTN: P1.9 U3.78 | length 10.7
  Top Layer w0.203: U3.78 64.56,38.926 65.659,37.827 65.659,33.401 65.024,32.766 P1.9
JTAG_TRSTN_A: P3.9 P4.9 | length 15.2
  Bottom Layer w0.305: v1(78.486,53.086) 85.979,53.086 P4.9
LNA_N: R54.2 U3.93 | length 31.3
  Top Layer w0.203: U3.93 63.594,44.926 63.79,44.729 v1(64.516,44.729)
  Top Layer w0.508: v1(45.212,35.052) R54.2
  PWR w0.508: v1(45.212,35.052) 45.212,42.037 49.022,45.847 63.398,45.847 v1(64.516,44.729)
LNA_P: R57.2 U3.92 | length 31.2
  Top Layer w0.203: U3.92 63.455,44.526 63.785,44.196 v1(64.008,44.196)
  Top Layer w0.508: R57.2 v1@45.966,32.504
  PWR w0.508: v1(45.974,32.512) 47.244,33.782 47.244,42.672 49.53,44.958 63.246,44.958 v1(64.008,44.196)
NetC46_1: C46.1 C48.1 L1.4 R11.1
NetC46_2: C46.2 U1.10 | length 1.6
  Top Layer w0.254: C46.2 30.484,49.788 U1.10
NetC48_2: C48.2 R11.2 U1.11 | length 2.9
  Top Layer w0.254: R11.2 29.464,49.403 29.984,48.883 U1.11
  Top Layer w0.356: C48.2 R11.2
NetC50_2: C50.2 U1.2 | length 1.6
  Top Layer w0.254: C50.2 29.71,44.442 29.984,44.716 U1.2
NetC51_2: C51.2 R12.1 U1.1 | length 3.6
  Top Layer w0.254: C51.2 28.321,45.085 28.547,45.311 U1.1
  Top Layer w0.356: C51.2 27.051,45.093 R12.1
NetC53_2: C53.2 U1.5 | length 1.6
  Top Layer w0.254: U1.5 31.484,44.716 31.758,44.442 C53.2
NetC55_2: C55.2 R19.1 | length 1
  Top Layer w0.356: R19.1 C55.2
NetJ2_1: J2.1 R55.2 R56.1 | length 19.6
  Top Layer w0.356: R56.1 R55.2
  Top Layer w0.508: J2.1 35.216,33.663 R55.2
NetJ2_2: J2.2 R53.1 R55.1 | length 15.1
  Top Layer w0.356: R55.1 R53.1
  Top Layer w0.508: J2.2 30.766,34.663 R55.1
NetL1_2: L1.2 U1.12 | length 12.9
  Top Layer w0.254: 28.857,48.161 U1.12
  Top Layer w0.356: L1.2 26.416,57.277 26.035,56.896 26.035,50.419 28.293,48.161 28.857,48.161
NetR12_2: R12.2 R13.2 U1.8 | length 8.4
  Top Layer w0.203: R12.2 v1@27.805,47.109 ; U1.8 31.484,48.883 v1(32.004,49.403)
  Top Layer w0.356: R13.2 R12.2
  PWR w0.203: v1(27.813,47.117) 28.829,48.133 30.734,48.133 v1(32.004,49.403)
NetR14_2: R14.2 R15.1 | length 2.2
  Top Layer w0.508: R14.2 R15.1
NetR16_2: R16.2 R22.2 | length 2.1
  Top Layer w0.508: R22.2 44.185,44.323 R16.2
NetR17_1: R17.1 R19.2 U2.2 U2.6 | length 5.1
  Top Layer w0.203: U2.6 36.453,40.001 36.195,40.259 36.195,40.767 36.449,41.021 39.243,41.021 39.751,40.513
NetR18_2: R18.2 U2.8 | length 1.9
  Top Layer w0.203: R18.2 36.457,38.235 36.821,38.599 U2.8
NetR20_1: R20.1 R23.1 | length 2.2
  Top Layer w0.508: R20.1 R23.1
NetR21_2: R21.2 R22.1 | length 2.9
  Top Layer w0.356: R22.1 44.185,46.239 45.212,45.212 45.455,45.212 R21.2
NetR24_2: R24.2 R25.1 | length 2.9
  Top Layer w0.203: R24.2 45.212,53.478 45.212,53.837 R25.1
NetR53_2: R53.2 R54.1 | length 1
  Top Layer w0.356: R53.2 R54.1
NetR56_2: R56.2 R57.1 | length 1
  Top Layer w0.356: R56.2 R57.1
PGOOD: PG.1 U1.6 | length 1
  Top Layer w0.254: U1.6 32.992,45.311
PMU_POR_RST: R31.1 R37.1 U3.74 | length 3.3
  Top Layer w0.203: U3.74 60.788,35.351 v1(60.833,35.306)
  Top Layer w0.356: R31.1 v1(73.152,42.418)
  Bottom Layer w0.356: R37.1 v1(73.152,42.418)
PMU_VDD_1P0: U3.43
POR_1P8: U3.88
POR_RST: U3.87
POR_RST_1P8: U3.89
RBOT: R5.1 U3.13 | length 3.8
  Top Layer w0.203: U3.13 56.388,51.054 57.15,51.816 R5.1
REF1: R15.2 R16.1 REF1.1 U3.35 | length 25.8
  Top Layer w0.203: R16.1 v1(48.514,42.418) 48.514,43.561 49.079,44.126 U3.35
  Top Layer w0.508: R16.1 46.228,42.175 R15.2
  Bottom Layer w0.305: v1(48.514,42.418) 48.514,45.974 48.768,46.228 48.768,46.863 47.752,47.879 47.752,52.959 REF1.1
REF2: R20.2 R21.1 REF2.1 U3.2 U3.25 | length 31.3
  Top Layer w0.203: v1(49.657,48.926) U3.25 ; U3.2 60.788,50.12 v1(60.833,50.165)
  Top Layer w0.356: v1(49.657,48.926) 50.419,49.688 REF2.1
  Top Layer w0.508: v1(46.112,48.26) 46.228,48.144 R21.1
  PWR w0.508: v1(46.112,48.26) 46.778,48.926 v1(49.657,48.926)
  Bottom Layer w0.305: v1(49.657,48.926) 49.657,49.403 51.054,50.8 52.451,50.8 53.721,49.53 54.991,49.53 55.626,50.165 v1(60.833,50.165)
REF3: R23.2 R24.1 REF3.1 U3.26 U3.34 | length 21.7
  Top Layer w0.203: R23.2 46.99,50.419 47.498,49.911 ; U3.34 49.073,44.526 47.498,46.101 47.498,49.911 ; U3.26 49.683,47.726 47.498,49.911
  Top Layer w0.356: R24.1 47.371,52.578 48.26,53.467 REF3.1
  Top Layer w0.508: R23.2 R24.1
RST: P1.1 R1.2 S1.1 S1.2 U3.81 | length 23.8
  Top Layer w0.203: U3.81 67.062,40.126 70.104,37.084 P1.1
  Top Layer w0.356: P1.1 71.247,31.115 72.456,32.324 S1.1 S1.2 72.456,37.15 72.898,37.592 R1.2
RST_A: P3.1 P4.1 | length 13.1
  Bottom Layer w0.305: v1(78.486,58.166) 91.059,58.166 P4.1
RST_BOOST: U3.11
RTOP: R3.2 U3.10 | length 3.7
  Top Layer w0.203: U3.10 57.588,51.619 58.039,52.07 R3.2
SOC_VDD_0P5: C40.1 R7.1 U3.95 | length 4.6
  Top Layer w0.203: U3.95 64.276,45.726 65.032,46.482 R7.1
  Top Layer w0.508: R7.1 C40.1
SOC_VDD_1P0: C41.1 R8.1 U3.91 | length 4.8
  Top Layer w0.203: U3.91 63.316,44.126 63.779,43.663 64.538,43.663 65.326,44.45 R8.1
  Top Layer w0.508: R8.1 C41.1@65.683,45.45
SOC_VDD_1P8: C42.1 R9.1 U3.90 | length 4.6
  Top Layer w0.203: U3.90 62.388,43.705 63.134,43.705 63.558,43.282 65.515,43.282 C42.1
  Top Layer w0.508: R9.1 C42.1
SPI_MISO: P1.16 P2.4 U3.60 | length 21.7
  Top Layer w0.203: U3.60 55.188,35.595 53.756,34.163 52.578,34.163 50.685,32.27 P2.4 50.685,29.071 52.541,27.215 P1.16
SPI_MISO_A: P3.16 P5.7 P6.7 | length 28.7
  Top Layer w0.305: P3.16 82.386,37.174 81.026,35.814 81.026,32.385 81.395,32.016 P5.7 89.904,32.016 P6.7
SPI_MOSI: P2.5 U3.61 | length 8.1
  Top Layer w0.203: P2.5 51.185,32.227 52.74,33.782 53.913,33.782 55.588,35.457 U3.61
SPI_MOSI_A: P5.6 P6.6 | length 12.5
  Top Layer w0.305: P5.6 90.293,32.516 91.059,31.75 92.71,31.75 P6.6
SPI_SCLK: P2.6 U3.62 | length 8
  Top Layer w0.203: P2.6 51.685,32.189 52.897,33.401 54.071,33.401 55.988,35.318 U3.62
SPI_SCLK_A: P5.5 P6.5 | length 9.1
  Top Layer w0.305: P5.5 91.436,33.016 P6.5
SPI_SS: P2.7 U3.63 | length 8
  Top Layer w0.203: P2.7 52.185,32.15 53.055,33.02 54.229,33.02 56.388,35.179 U3.63
SPI_SS_A: P5.4 P6.4 | length 12.5
  Top Layer w0.305: P5.4 90.158,33.516 90.932,34.29 92.71,34.29 P6.4
VCAP_BOOST: U3.31
VCAP_DBLR: U3.30
VCAP_STUP: +1.2V-SOC.1 R26.2 R26.3 U3.29 | length 2.4
  Top Layer w0.203: v1(48.006,46.482) 48.05,46.526 U3.29
VCAP_SW_CAP: U3.33
VDD: C3.1 C4.1 R28.1 R33.1 U3.73 | length 5.7
  Top Layer w0.203: v1(60.071,35.306) 60.388,35.623 U3.73
  Top Layer w0.356: R28.1 v1(73.152,40.64)
  Bottom Layer w0.356: R33.1 v1(73.152,40.64)
  Bottom Layer w0.508: v1(60.071,35.306) 59.817,35.56 C4.1 C3.1
VDD_2T_UNTRIM: C1.1 C2.1 U3.24 | length 3.9
  Top Layer w0.203: v1(51.308,50.165) 51.562,50.165 51.988,49.739 U3.24
  Bottom Layer w0.508: v1(51.308,50.165) 51.816,49.657 C1.1 C2.1
VDD_05: +0.5V.1 C15.1 C16.1 R7.2 R39.2 R40.2 R41.2 R42.2 R43.2 R44.2 R45.2 | length 5.9
  Top Layer w0.356: +0.5V.1 71.39,53.197 R39.2
  Top Layer w0.508: R7.2 C16.1@68.699,46.482
VDD_10: +1.0V.1 C13.1 C14.1 R8.2 R27.2 R29.2 R31.2 R32.2 | length 15.5
  Top Layer w0.356: R27.2 71.382,45.601 71.501,45.72 73.279,45.72 74.422,46.863 74.422,52.832 +1.0V.1
  Top Layer w0.508: R8.2 C14.1@68.699,44.45
VDD_18: +1.8V.1 C11.1 C12.1 R9.2 R28.2 R30.2 | length 19.8
  Top Layer w0.356: R28.2 71.382,41.029 71.628,41.275 73.66,41.275 75.311,42.926 75.311,54.483 +1.8V.1
  Top Layer w0.508: R9.2 C11.1@68.699,42.418
VDD_AFE: C7.1 C8.1 R45.1 R52.1 U3.94 | length 7.8
  Top Layer w0.203: U3.94 64.511,45.326 64.651,45.466 v1(64.77,45.466)
  Top Layer w0.356: R45.1 v1(73.152,49.53)
  Bottom Layer w0.254: C7.1 63.221,43.942 63.475,44.196 63.475,44.679 64.262,45.466 v1(64.77,45.466)
  Bottom Layer w0.356: R52.1 v1(73.152,49.53)
  Bottom Layer w0.508: C8.1 C7.1
VDD_BIN: C5.1 C6.1 R40.1 R47.1 U3.54 | length 5.5
  Top Layer w0.203: v1(51.816,35.687) 52.451,35.687 52.788,36.024 U3.54
  Top Layer w0.305: R40.1 v1(73.152,47.752)
  Bottom Layer w0.305: R47.1 v1(73.152,47.752)
  Bottom Layer w0.508: v1(51.816,35.687) C6.1 C5.1
VDD_CTRL: C17.1 C18.1 R43.1 R50.1 U3.97 | length 7.2
  Top Layer w0.203: U3.97 63.417,46.526 v1(64.643,47.752)
  Top Layer w0.356: R43.1 v1(73.152,51.308)
  Bottom Layer w0.356: R50.1 v1(73.152,51.308)
  Bottom Layer w0.508: C17.1 C18.1 63.754,47.498 64.008,47.752 v1(64.643,47.752)
VDD_JTAG: C9.1 C10.1 R42.1 R49.1 U3.86 | length 5.8
  Top Layer w0.203: U3.86 63.462,42.126 v1(64.008,42.672)
  Top Layer w0.356: R42.1 v1(73.152,48.641)
  Bottom Layer w0.356: R49.1 v1(73.152,48.641)
  Bottom Layer w0.508: C10.1 C9.1 63.5,42.164 v1(64.008,42.672)
VDD_PER: C19.1 C20.1 R44.1 R51.1 U3.96 | length 7.4
  Top Layer w0.203: U3.96 63.906,46.126 v1(64.643,46.863)
  Top Layer w0.356: R44.1 v1(73.152,50.419)
  Bottom Layer w0.356: R51.1 v1(73.152,50.419)
  Bottom Layer w0.508: C19.1 C20.1 63.5,45.72 v1(64.643,46.863)
VDD_SPI_HI: C21.1 C22.1 R30.1 R34.1 U3.64 | length 4.9
  Top Layer w0.203: U3.64 56.788,35.795 v1(56.896,35.687)
  Top Layer w0.356: R30.1 v1(73.152,39.751)
  Bottom Layer w0.356: R34.1 v1(73.152,39.751)
  Bottom Layer w0.508: v1(56.896,35.687) 56.515,36.068 C21.1 C22.1
VDD_SPI_LO: C23.1 C24.1 R41.1 R48.1 U3.59 | length 5
  Top Layer w0.203: v1(54.483,35.687) 54.788,35.992 U3.59
  Top Layer w0.305: R41.1 v1(73.152,46.863)
  Bottom Layer w0.305: R48.1 v1(73.152,46.863)
  Bottom Layer w0.508: C23.1 C24.1 54.991,36.195 v1(54.483,35.687)
VDDHIO: C27.1 C28.1 R1.1 R27.1 R35.1 U3.99 | length 17.4
  Top Layer w0.203: U3.99 63.201,47.326 63.627,47.752 v1(63.627,48.514)
  Top Layer w0.356: v1(63.627,48.514) 64.897,49.784 64.897,50.165 65.405,50.673 65.786,50.673 C27.1 ; R27.1 v1(73.152,45.085)
  Top Layer w0.508: C27.1@65.786,50.673 C28.1@65.786,51.546 ; R1.1 v1(75.184,37.592)
  PWR w0.508: v1(73.152,45.085) 73.787,45.085 75.184,43.688 v1(75.184,37.592)
  Bottom Layer w0.356: R35.1 v1(73.152,45.085)
VDDLIO: C25.1 C26.1 R39.1 R46.1 U3.98 | length 6.6
  Top Layer w0.203: U3.98 63.309,46.926 64.008,47.625 64.008,47.879 v1(64.643,48.514)
  Top Layer w0.356: v1(64.643,48.514) C25.1 ; R39.1 v1(73.152,52.197)
  Top Layer w0.508: C25.1 C26.1
  Bottom Layer w0.356: R46.1 v1(73.152,52.197)
VIN_BOOST: U3.9
VIN_DBLR: C39.1 C43.1 U3.27 | length 3.7
  Top Layer w0.203: v1(49.022,47.625) 49.321,47.326 U3.27
  Bottom Layer w0.508: v1(49.022,47.625) 49.53,47.117 C43.1 C39.1
VMPP: C38.1 R3.1 R5.2 U3.23 | length 15.8
  Top Layer w0.203: U3.23 52.388,52.38 C38.1
  Top Layer w0.356: C38.1 52.459,55.253 54.102,56.896 56.769,56.896 57.15,56.515 R5.2 R3.1
VOUT_DBLR: U3.32
VOUT_DICKSON: C35.1 U3.1 | length 4.4
  Top Layer w0.203: U3.1 61.753,48.926 62.23,49.403 C35.1
VOUT_LDO_1P0: C37.1 R2.2 U3.17 | length 7.3
  Top Layer w0.203: v1(54.61,50.165) 54.788,49.987 U3.17
  Bottom Layer w0.305: v1(54.61,50.165) 54.102,50.673 54.102,53.848 54.483,54.229 R2.2 C37.1
VOUT_LDO_1P8: C45.1 R6.2 U3.16 | length 7.2
  Top Layer w0.203: R6.2 54.61,54.229 54.356,53.975 54.356,51.181 55.188,50.349 U3.16
  Top Layer w0.356: R6.2 C45.1
VOUT_SW_CAP: U3.4
VREF_2T_UNTRIM: U3.22
VX_BOOST: U3.18
XO_CLK: U3.6 XO.1 | length 10.7
  Top Layer w0.203: U3.6 59.188,49.917 61.214,51.943 61.214,55.372 XO.1
XTALA: C59.1 U3.8 U5.3 XTLA.1 Y1.1 | length 14.9
  Top Layer w0.203: XTLA.1 58.039,55.347 Y1.1 58.928,52.934 58.928,51.943 58.388,51.403 U3.8
  Bottom Layer w0.254: C59.1 58.454,52.459 Y1.1 58.89,54.496 U5.3
XTALB: C60.1 U3.7 U5.1 XTLB.1 Y1.2 | length 15.5
  Top Layer w0.203: U3.7 58.832,48.97 58.832,50.922 59.69,51.779 Y1.2 60.579,53.428 60.579,56.896 XTLB.1
  Bottom Layer w0.254: U5.1 60.49,53.339 Y1.2 59.769,52.459 C60.1
pads on no net: J1. J2.4 J2.5 L1.0 P1.10 P1.12 P2. P3.4 P3.10 P3.12 P5. U1.4 U2.3 U2.4 U2.5 U3. U3.19 U3.20 U3.21 U3.48 U3.49 U3.50 U3.57 U3.58 U3.83 U3.84 U3.85 U4.1

## Polygon pours and split planes (outlines as drawn)
+3.3V on Top Layer "+3.3V" (solid, pour order 54): 49.276,31.877 48.641,32.512 47.244,32.512 46.99,32.258 46.99,30.861 49.276,30.861
VCAP_STUP on Top Layer "VCAP_STUP" (solid, pour order 52): 36.83,42.799 36.83,45.847 37.211,46.228 37.719,46.228 37.973,46.228 40.005,44.196 40.64,44.196 40.767,44.069 40.767,43.307 40.64,43.18 39.751,43.18 39.116,43.18 38.354,42.418 37.211,42.418
+VIN-BST-T on Top Layer "+VIN-BST-T" (solid, pour order 20): 38.989,54.737 38.989,53.467 38.862,53.34 35.687,53.34 34.671,54.356 34.671,57.404 33.655,58.42 33.401,58.42 30.861,58.42 30.861,56.134 33.401,56.134 33.528,56.134 34.163,55.499 34.163,48.26 36.703,48.26 36.83,48.26 38.735,50.165 39.497,50.927 39.497,53.721 39.497,54.737
VDD_05 on Top Layer "VDD_05" (solid, pour order 16): 68.453,46.228 70.104,46.228 70.231,46.355 71.628,46.355 71.755,46.482 71.755,52.705 70.866,52.705 70.485,52.324 70.485,50.038 70.485,47.244 69.977,46.736 68.453,46.736
VDD_10 on Top Layer "VDD_10" (solid, pour order 14): 68.453,44.704 69.977,44.704 70.866,45.593 71.755,45.593 71.755,41.91 70.866,41.91 70.485,42.291 70.485,43.688 70.104,44.069 69.977,44.196 68.453,44.196
VDD_18 on Top Layer "VDD_18" (solid, pour order 12): 68.453,42.672 69.215,42.672 70.739,41.148 71.755,41.148 71.755,39.243 70.739,39.243 68.453,41.529
+1.2V on Top Layer "+1.2V" (solid, pour order 10): 40.005,40.894 41.275,40.894 41.656,40.513 42.418,39.751 43.561,39.751 44.831,39.751 44.831,41.021 43.561,41.021 42.672,41.91 41.783,42.799 40.005,42.799
PGOOD on Top Layer "PGOOD" (solid, pour order 8): 32.766,45.466 33.274,45.974 34.671,45.974 34.925,45.72 34.925,44.958 34.671,44.704 33.274,44.704 32.766,45.212
NetR17_1 on Top Layer "NETR17_1" (solid, pour order 6): 38.735,39.624 39.37,39.624 39.497,39.751 39.497,40.513 39.624,40.64 40.513,40.64 40.64,40.513 40.64,38.989 40.513,38.862 39.624,38.862 39.497,38.989 39.497,39.243 39.37,39.37 39.116,39.37 38.735,39.37
+3.3V on Top Layer "+3.3V" (solid, pour order 4): 33.909,40.64 35.814,40.64 35.814,40.005 36.195,39.624 36.957,39.624 36.957,39.37 36.195,39.37 35.814,38.989 33.909,38.989
+3.3V on Top Layer "+3.3V" (solid, pour order 2): 30.353,45.593 30.353,44.958 30.353,39.751 33.274,36.83 34.671,36.83 34.671,42.672 34.544,42.799 31.623,42.799 30.607,43.815 30.607,45.593
NetC46_1 on Top Layer "NETC46_1" (solid, pour order 0): 30.734,54.229 30.861,54.356 33.401,54.356 33.528,54.229 33.528,51.689 32.258,50.419 28.067,50.419 27.94,50.546 27.94,51.181 28.067,51.308 29.464,51.308 30.607,51.308 30.734,51.435
GND on Top Layer "GND" (solid, pour order 64): 25.908,60.071 25.654,59.817 25.654,59.055 25.654,25.908 25.908,25.654 26.67,25.654 75.692,25.654 75.946,25.908 75.946,26.289 75.946,59.817 75.692,60.071
+3.3V on PWR "+3.3V" (solid, pour order 56): 34.29,37.846 34.671,37.465 40.386,31.75 46.228,31.75 46.609,31.75 47.244,32.385 48.641,32.385 48.895,32.131 48.895,31.75 48.006,30.861 45.593,30.861 43.561,30.861 39.37,30.861 39.243,30.861 33.274,36.83 33.147,36.957 33.147,37.719 33.274,37.846
FRAM_DIS on PWR "FRAM_DIS" (solid, pour order 48): 73.406,44.45 74.422,43.434 74.422,39.116 67.31,32.004 54.991,32.004 53.721,32.004 50.165,35.56 50.165,36.449 49.022,37.592 49.022,43.688 49.149,43.815 49.403,43.815 49.53,43.688 49.53,41.021 49.53,37.846 50.673,36.703 50.673,36.068 54.102,32.639 63.754,32.639 66.929,32.639 73.66,39.37 73.66,39.497 73.66,43.561 73.279,43.942 73.025,43.942 72.898,44.069 72.898,44.323 73.025,44.45
VDDHIO on PWR "VDDHIO" (solid, pour order 46): 72.898,45.212 73.025,45.339 73.533,45.847 73.66,45.974 73.66,52.578 73.533,52.705 67.945,52.705 63.881,48.641 63.881,48.387 63.754,48.26 63.5,48.26 63.373,48.387 63.373,48.641 64.77,50.038 67.945,53.213 72.898,53.213 73.914,53.213 74.422,52.705 74.422,51.435 74.422,45.974 73.279,44.831 73.025,44.831 72.898,44.958
VDD_SPI_LO on PWR "VDD_SPI_LO" (solid, pour order 44): 54.61,35.433 55.372,35.433 59.69,39.751 62.357,39.751 63.754,41.148 66.802,41.148 72.263,46.609 73.279,46.609 73.406,46.736 73.406,46.99 73.279,47.117 72.009,47.117 66.421,41.529 64.262,41.529 63.373,41.529 62.992,41.148 62.103,40.259 60.96,40.259 59.563,40.259 58.039,38.735 59.563,40.259 59.309,40.259 54.991,35.941 54.356,35.941 54.229,35.814 54.229,35.56 54.356,35.433
VDD_BIN on PWR "VDD_BIN" (solid, pour order 42): 52.07,35.56 54.61,38.1 54.737,38.227 55.753,38.227 55.88,38.354 57.531,40.005 58.166,40.64 60.706,40.64 61.976,40.64 62.992,41.656 63.119,41.783 64.516,41.783 65.405,41.783 71.12,47.498 73.279,47.498 73.406,47.625 73.406,47.879 73.279,48.006 70.612,48.006 69.469,46.863 64.77,42.164 64.008,42.164 63.627,42.164 63.5,42.164 63.373,42.164 63.246,42.164 62.611,42.164 61.595,41.148 59.69,41.148 57.785,41.148 56.007,39.37 55.499,38.862 54.61,38.862 51.562,35.814 51.562,35.56 51.689,35.433 51.943,35.433
VDD_JTAG on PWR "VDD_JTAG" (solid, pour order 40): 63.881,42.926 65.913,44.958 66.04,44.958 66.294,44.958 70.231,48.895 73.279,48.895 73.406,48.768 73.406,48.514 73.279,48.387 70.485,48.387 70.358,48.387 68.961,46.99 64.389,42.418 63.881,42.418 63.754,42.545 63.754,42.799
VDD_AFE on PWR "VDD_AFE" (solid, pour order 36): 64.643,45.72 65.913,45.72 69.977,49.784 73.279,49.784 73.406,49.657 73.406,49.403 73.279,49.276 70.104,49.276 66.04,45.212 64.643,45.212 64.516,45.339 64.516,45.593
VDD_PER on PWR "VDD_PER" (solid, pour order 34): 64.516,47.117 65.151,47.117 65.405,47.117 68.961,50.673 73.279,50.673 73.406,50.546 73.406,50.292 73.279,50.165 71.755,50.165 69.088,50.165 65.532,46.609 64.643,46.609 64.516,46.609 64.389,46.736 64.389,46.99
VDD_CTRL on PWR "VDD_CTRL" (solid, pour order 32): 64.516,48.006 64.897,48.006 65.278,48.006 68.834,51.562 73.279,51.562 73.406,51.435 73.406,51.181 73.279,51.054 68.961,51.054 65.405,47.498 64.516,47.498 64.389,47.625 64.389,47.879
VDDLIO on PWR "VDDLIO" (solid, pour order 30): 64.389,48.641 64.516,48.768 68.199,52.451 73.279,52.451 73.406,52.324 73.406,52.07 73.279,51.943 73.025,51.943 68.326,51.943 64.77,48.26 64.516,48.26 64.389,48.387
AFE_BUF_PG on PWR "AFE_BUF_PG" (solid, pour order 28): 64.008,40.386 67.945,40.386 70.612,43.053 71.882,43.053 73.279,43.053 73.406,43.18 73.406,43.434 73.279,43.561 70.485,43.561 67.818,40.894 63.754,40.894 63.627,40.767 63.627,40.513 63.754,40.386
PMU_POR_RST on PWR "PMU_POR_RST" (solid, pour order 26): 60.579,35.179 60.706,35.052 60.96,35.052 61.087,35.179 62.992,37.084 65.151,37.084 66.167,37.084 71.247,42.164 73.279,42.164 73.406,42.291 73.406,42.545 73.279,42.672 72.009,42.672 70.739,42.672 65.786,37.719 62.992,37.719 62.865,37.719 60.579,35.433
VDD_SPI_HI on PWR "VDD_SPI_HI" (solid, pour order 24): 57.023,35.941 57.15,35.814 57.15,35.306 58.801,33.655 61.214,33.655 64.77,33.655 66.294,35.179 71.12,40.005 73.279,40.005 73.406,39.878 73.406,39.624 73.279,39.497 71.374,39.497 69.596,37.719 64.897,33.02 63.119,33.02 58.42,33.02 58.039,33.401 56.642,34.798 56.642,35.052 56.642,35.814 56.769,35.941
VDD on PWR "VDD" (solid, pour order 22): 60.198,35.56 60.325,35.433 60.325,34.925 60.452,34.798 60.706,34.798 64.262,34.798 70.104,40.64 70.358,40.894 73.152,40.894 73.279,40.894 73.406,40.767 73.406,40.513 73.279,40.386 70.993,40.386 69.215,38.608 64.516,33.909 60.579,33.909 59.817,34.671 59.817,35.433 59.944,35.56
GND_A on Bottom Layer "GND" (solid, pour order 68): 76.835,59.69 100.33,59.69 100.33,26.035 76.835,26.035
VCAP_STUP on Bottom Layer "VCAP_STUP" (solid, pour order 58): 48.26,46.355 48.006,46.101 39.751,46.101 38.227,44.577 37.084,44.577 36.83,44.831 36.83,45.847 37.846,46.863 48.006,46.863 48.26,46.609
+3.3V on Bottom Layer "+3.3V" (solid, pour order 60): 33.274,37.846 34.417,37.846 34.671,37.592 34.671,33.274 38.1,29.845 38.1,27.686 34.036,27.686 34.036,29.845 33.02,30.861 33.02,34.798 33.02,37.592
GND on Bottom Layer "GND" (solid, pour order 62): 25.908,60.071 25.781,59.944 25.654,59.944 25.654,59.309 25.654,25.908 25.908,25.654 26.543,25.654 32.639,25.654 34.544,25.654 48.768,25.654 75.692,25.654 75.946,25.908 75.946,26.543 75.946,59.817 75.692,60.071
GND on GND "GND" (solid, pour order 66): 25.908,60.071 25.654,59.817 25.654,25.908 25.908,25.654 75.692,25.654 75.946,25.908 75.946,59.817 75.692,60.071

## Keep-outs
Keep-Out Layer:
  lines w0.254: 25.4,25.4 25.4,60.325 100.711,60.325 100.711,25.4 25.4,25.4

## Silkscreen, mask and mechanical layers (free items; w line width, h text height)
Top Overlay:
  text "RST" at 86.614,57.277 h0.6
  text "GND" at 95.631,57.277 h0.6
  text "CLK" at 86.614,54.737 h0.6
  text "CTRL_1" at 95.631,54.737 h0.6
  text "CLK_PGLA" at 85.09,52.197 h0.6
  text "CTRL_0" at 95.631,52.197 h0.6
  text "JTAG_TDO" at 85.09,49.657 h0.6
  text "JTAG_TCK" at 95.631,49.657 h0.6
  text "JTAG_TRSTN" at 83.82,47.117 h0.6
  text "JTAG_TDI" at 95.631,47.117 h0.6
  text "JTAG_TMS" at 85.09,44.577 h0.6
  text "GND" at 95.631,44.45 h0.6
  text "GPIO_0" at 86.487,37.719 h0.6
  text "GPIO_1" at 95.885,37.719 h0.6
  text "GPIO_2" at 86.487,35.306 h0.6
  text "SPI_SS" at 95.885,35.179 h0.6
  text "*Made on Grounds for humans*" at 50.8,33.147 h0.51
  text "SPI_SCLK" at 85.344,32.639 h0.6
  text "SPI_MOSI" at 95.885,32.639 h0.6
  text "SPI_MISO" at 85.471,30.099 h0.6
  text "GND" at 95.885,30.099 h0.6
  text "UVA ECE (C)" at 71.12,28.194 h0.5
  text "+3.3V" at 87.122,27.559 h0.6
  text "GND" at 95.885,27.432 h0.6
  text "SAP1.0" at 71.12,27.305 h0.51
  text "LJLR 03/18" at 71.12,26.416 h0.51
Mechanical 2:
  lines w0.254: 76.2,25.4 76.2,60.325

## Text inside footprints (layer, text, board x,y; h text height)
P4: Top Overlay "1" at 91.186,59.817 h0.6 r270; Top Overlay "2" at 93.726,59.944 h0.6 r270
P6: Top Overlay "1" at 91.059,40.132 h0.6 r270; Top Overlay "2" at 93.726,40.259 h0.6 r270